# EAGLE board sio_protoboard (EAGLE 7.5.0)
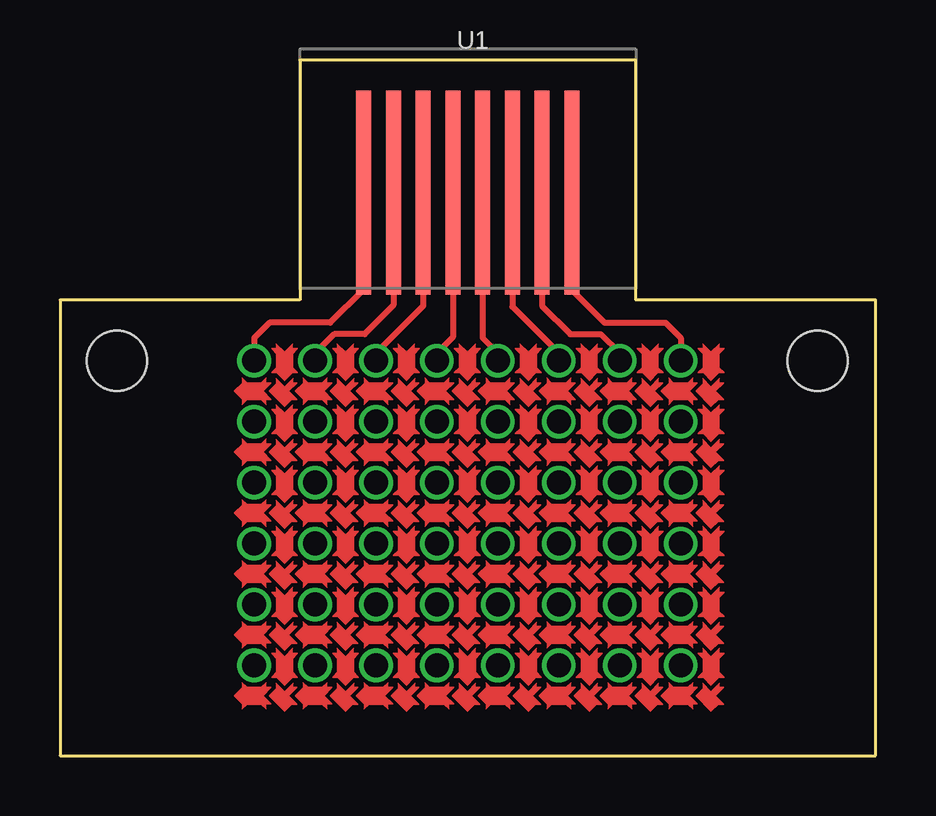
[diagram p0: board, top side]
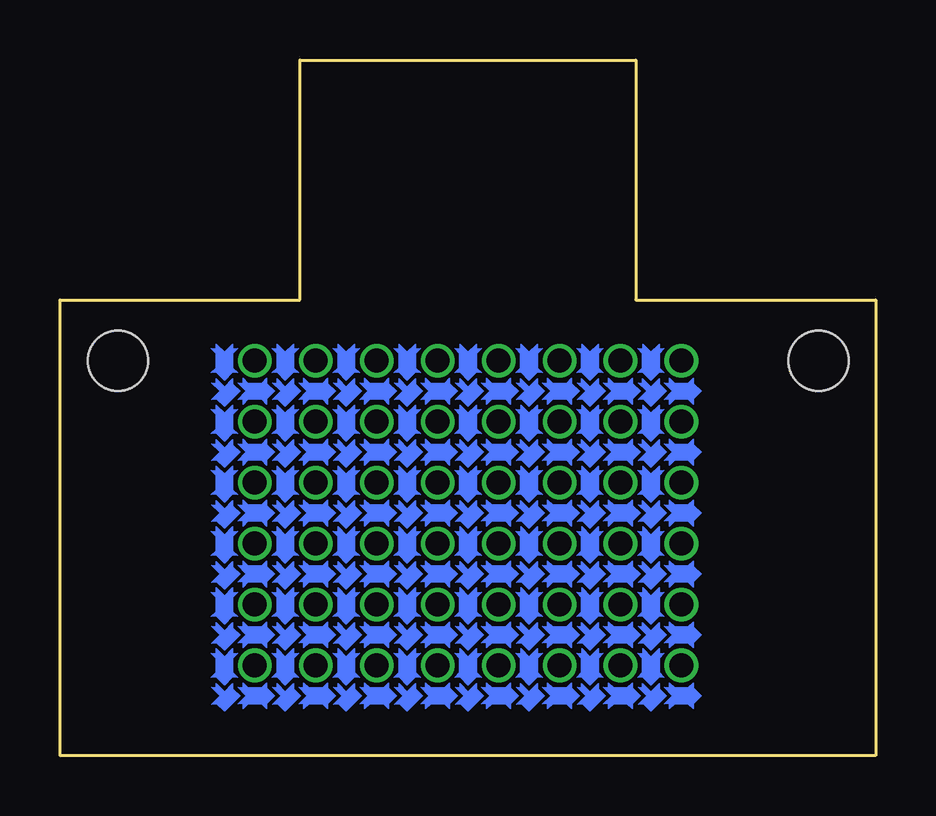
[diagram p1: board, bottom side, seen from below]

Size 34 x 29 mm. Coordinates in mm from the lower left corner, seen from the top.
Outline: 10,19 0,19 0,0 34,0 34,19 24,19 24,29 10,29 10,19
Copper layers (1*16): Top 0.035mm / dielectric 1.5mm / Bottom 0.035mm
Design rules "default *": minimum track width 10mil, minimum drill 0.61mm, track to track 8mil, track to pad 8mil, pad to pad 8mil, via to via 8mil, smd to smd 8mil, copper to edge 40mil, drill to drill 8mil, minimum pad ring 0mil, minimum via ring 8mil, stop-mask expansion 2mil, vias tented up to drill 6mil, thermal gap 10mil
Net classes: 0 Default: width 0.254 mm, clearance 0.152 mm
Holes 2.5 mm at 2.38,16.46 31.59,16.46

## Footprints (pad centres in the part's own frame; a part is rotated, then mirrored left to right if it is on the bottom)
SIO_062x10 = smd 0.62 x 8.5: 1 -4.34,0; 2 -3.1,0; 3 -1.86,0; 4 -0.62,0; 5 0.62,0; 6 1.86,0; 7 3.1,0; 8 4.34,0
Row_1x8_LP_2Sided = drill 1 pad 1.4: 1 0,0; 2 2.54,0; 3 5.08,0; 4 7.62,0; 5 10.16,0; 6 12.7,0; 7 15.24,0; 8 17.78,0

## Placement (x,y rotation side)
U1  SIO_062X10  [SIO_062x10]  17,23.46 0 top
U2  ROW_1X8_LP_2SIDED  [Row_1x8_LP_2Sided]  8.1,13.92 0 top
U3  ROW_1X8_LP_2SIDED  [Row_1x8_LP_2Sided]  8.1,11.38 0 top
U4  ROW_1X8_LP_2SIDED  [Row_1x8_LP_2Sided]  8.1,8.84 0 top
U5  ROW_1X8_LP_2SIDED  [Row_1x8_LP_2Sided]  8.1,6.3 0 top
U6  ROW_1X8_LP_2SIDED  [Row_1x8_LP_2Sided]  8.1,3.76 0 top
U7  ROW_1X8_LP_2SIDED  [Row_1x8_LP_2Sided]  8.1,16.46 0 top

## Library data of the parts
U1-U7 = common

## Nets
Net_0: U1.4 U7.4
Net_1: U1.5 U7.5
Net_2: U1.3 U7.3
Net_3: U1.2 U7.2
Net_4: U1.1 U7.1
Net_5: U1.6 U7.6
Net_6: U1.7 U7.7
Net_7: U1.8 U7.8

## Tracks (layer width: path | path; a pad name or v marks a point on that pad's centre or on a via)
Net_0
  Top 0.254: U1.4 16.38,17.44 15.71,16.78 U7.4
Net_1
  Top 0.254: U1.5 17.62,17.41 18.26,16.78 U7.5
Net_2
  Top 0.254: U1.3 15.14,18.74 13.18,16.78 U7.3
Net_3
  Top 0.254: U1.2 13.9,18.77 12.7,17.57 11.43,17.57 10.63,16.78 U7.2
Net_4
  Top 0.254: U1.1 12.66,19.44 11.27,18.05 8.73,18.05 8.1,17.41 U7.1
Net_5
  Top 0.254: U1.6 18.86,18.71 20.8,16.78 U7.6
Net_6
  Top 0.254: U1.7 20.1,18.74 21.27,17.57 22.54,17.57 23.34,16.78 U7.7
Net_7
  Top 0.254: U1.8 21.34,19.41 22.7,18.05 25.24,18.05 25.88,17.41 U7.8

## Text on the board
tPlace: U1